# Altium PCB CONVERSOR_4_20mA.PcbDoc
Units mm, origin at the board's own origin, x right, y up, seen from the top; angles counter-clockwise.
Board outline 64.52 x 57.53 mm, 2 copper layers (Top Layer, Bottom Layer); 31 components, 21 nets, 80 pads, 9 vias.
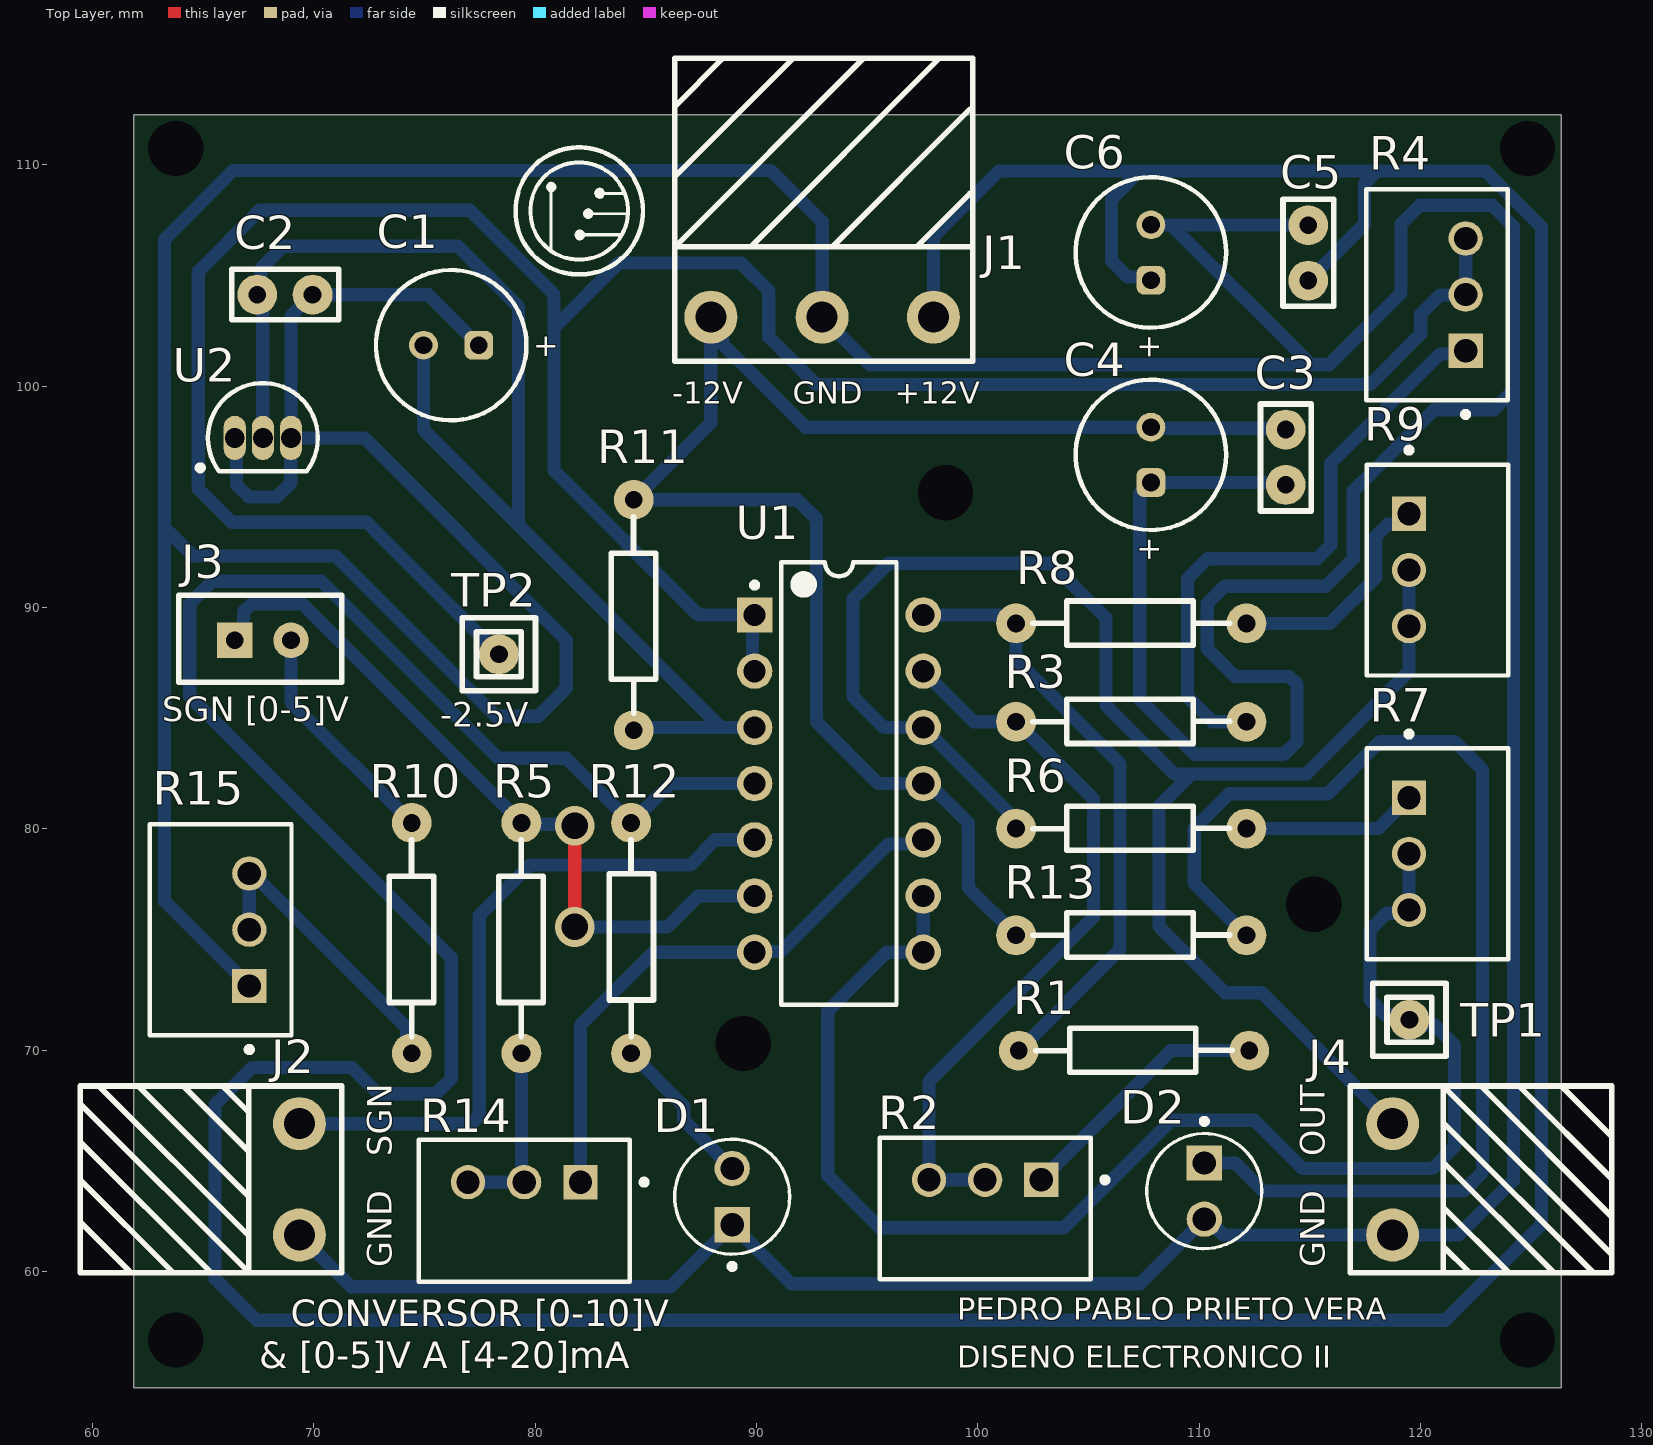
[diagram p0: Top Layer view]
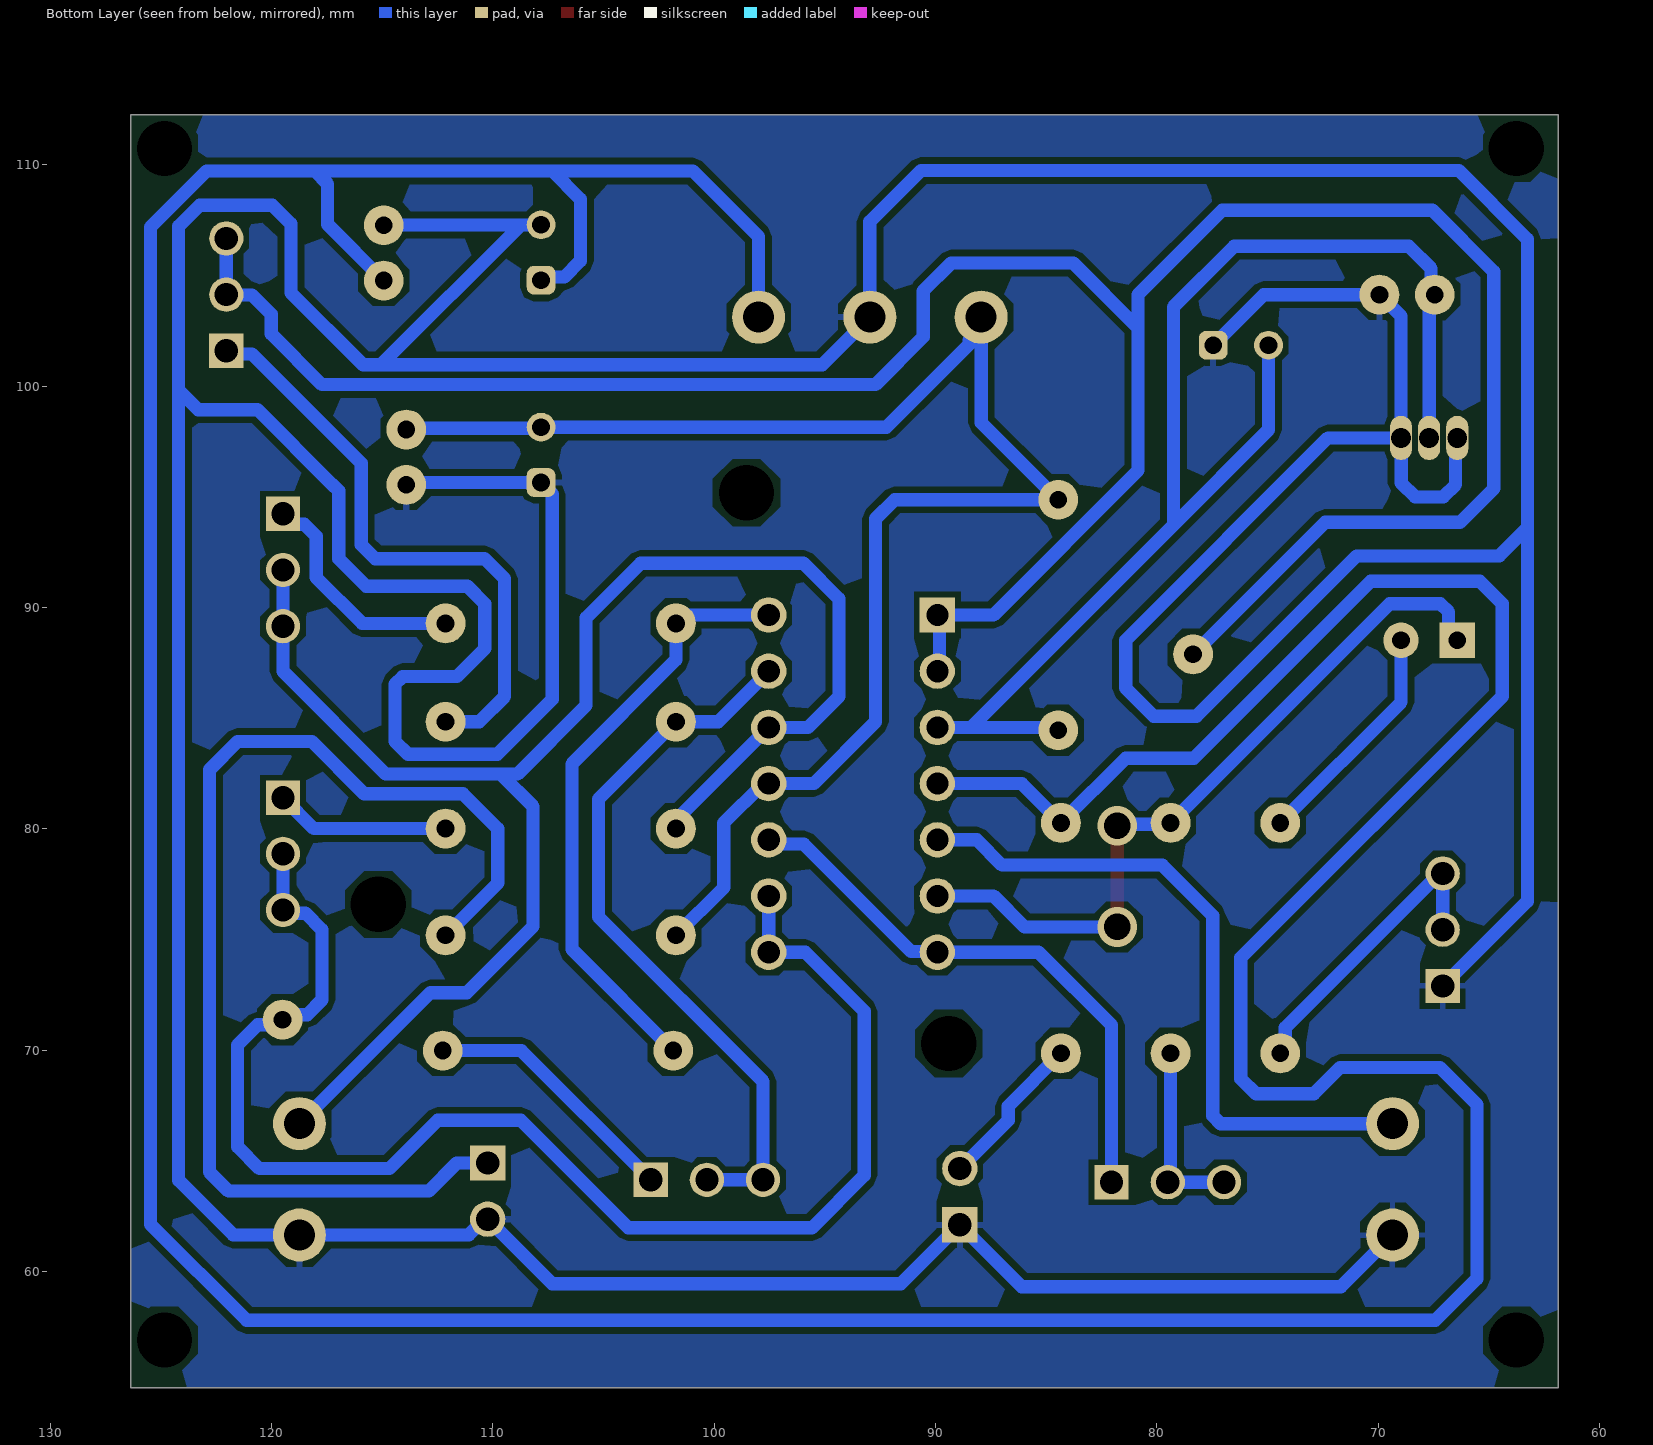
[diagram p1: Bottom Layer view, seen from below]
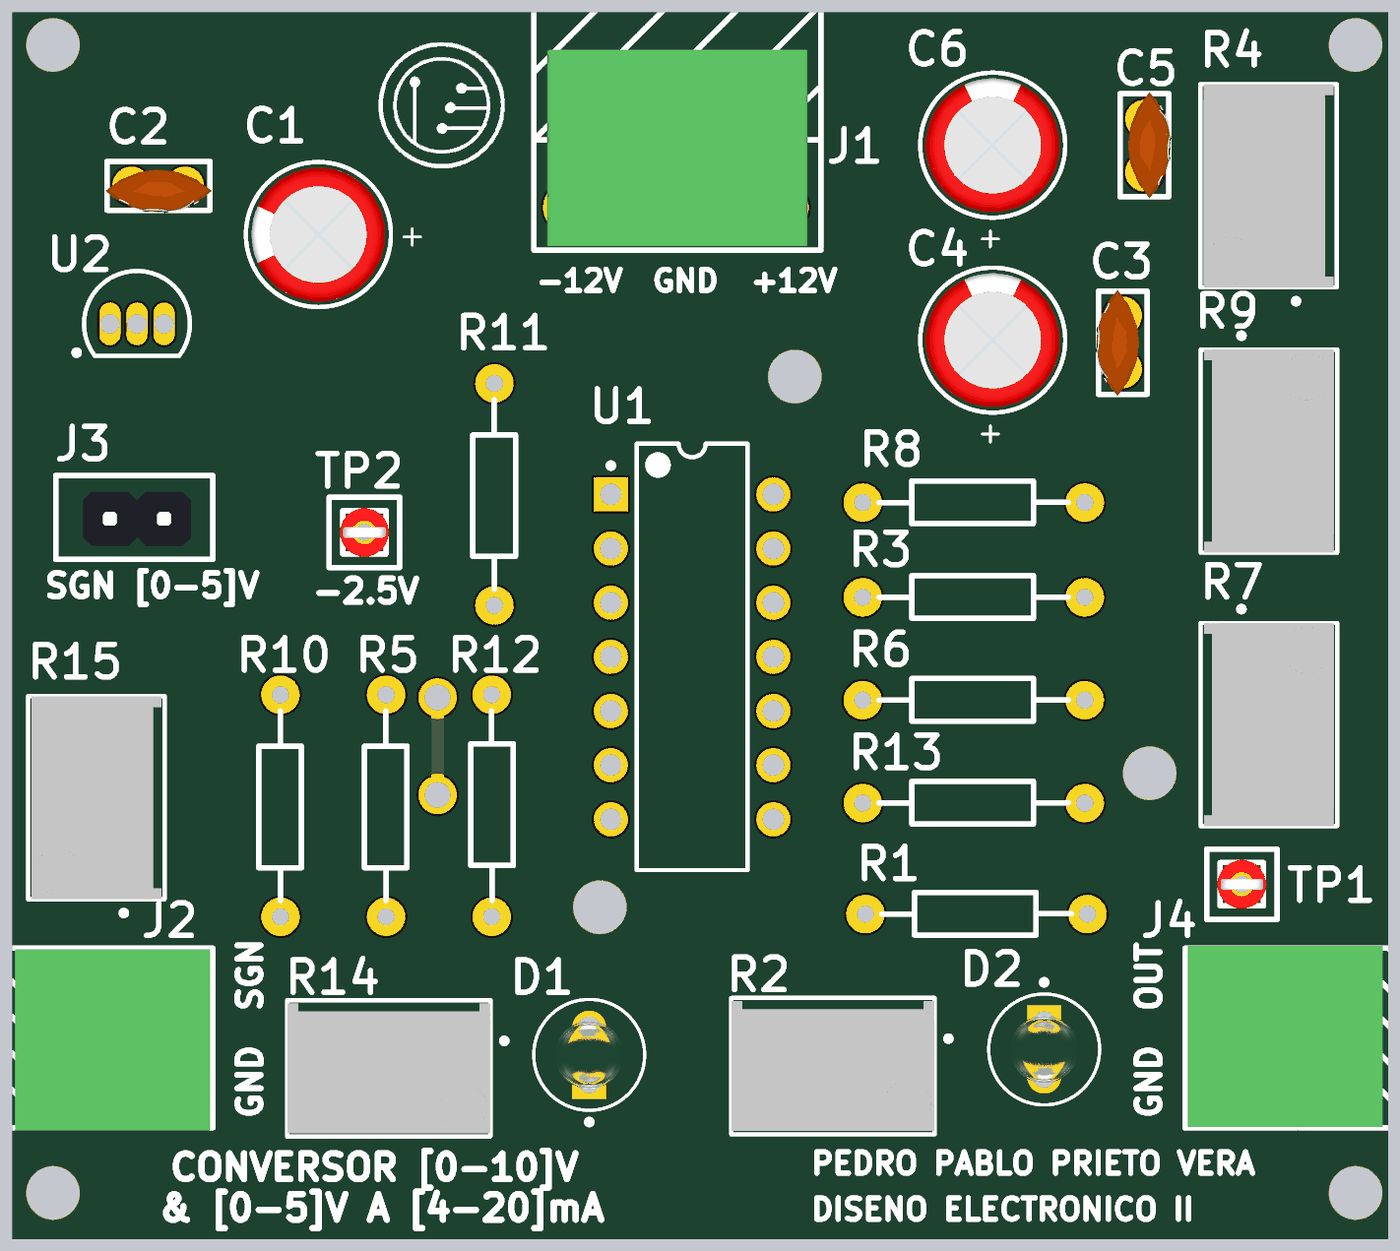
[diagram p2: 3D render of the assembled board from above, using the file's embedded part models]

## Layer stack, top to bottom
Top Solder: solder mask 0.0102, Solder Resist, Dk 3.5
Top Layer: signal copper 0.0356
Dielectric 1: dielectric 0.32, FR-4, Dk 4.8
Bottom Layer: signal copper 0.0356
Bottom Solder: solder mask 0.0102, Solder Resist, Dk 3.5

## Board outline
61.849,54.737 61.849,112.268 126.365,112.268 126.365,54.737

## Design rules (kind name [scope] priority, off if disabled: settings)
Clearance [All] p1: gap=0.27 ignorepadtopadclearanceinfootprint=FALSE
PolygonConnect [All] p1: connectstyle=Relief reliefconductorwidth=0.254 reliefentries=4 polygonreliefangle="90 Angle" airgapwidth=0.254
RoutingVias [All] p1: holewidth=0.711 width=1.27 viastyle="Through Hole" minholewidth=0.711 minwidth=1.27 maxholewidth=0.711 maxwidth=1.27
SolderMaskExpansion [All] p1: expansion=0.102 istentingtop=FALSE
Width [All] p1: maxlimit=0.9 minlimit=0.59 preferedwidth=0.6
30 further rules are at their usual default settings.

## Components (designator, comment, footprint, x,y, rotation, side; value= is the part's Value field where it differs from the comment)
C1 "1uF" WCAP-ATG8_D6.3H11 76.2,101.854 r0 top
C2 "100nF" CAP_CER_2.5mm 67.437,104.14 r0 top
C3 "100nF" CAP_CER_2.5mm 113.919,98.044 r270 top
C4 "1uF" WCAP-ATG8_D6.3H11 107.823,96.901 r270 top
C5 "100nF" CAP_CER_2.5mm 114.935,104.775 r90 top
C6 "1uF" WCAP-ATG8_D6.3H11 107.823,106.045 r270 top
D1 "TLLG4400-AS12" FP-6_544-5255_01-4-MFG 88.9,63.373 r90 top
D2 "TLLG4400-AS12" FP-6_544-5255_01-4-MFG 110.236,63.627 r270 top
J1 "BORNERA_3P" BORNERA_3P 97.994,103.124 r180 top
J2 "BORNERA-2P" BORNERA_2P 69.342,66.675 r270 top
J3 "TSW-2P" TSW-2P 66.421,88.519 r0 top
J4 "BORNERA_2P_NT" BORNERA_2P_NT 123.825,64.057 r90 top
R1 "200" RES_10K_1/4W 102.997,69.977 r0 top
R2 "500 Ohms" BOUR-3299W-3_V 100.33,62.845 r180 top
R3 "560" RES_10K_1/4W 102.87,84.836 r0 top
R4 "200 Ohms" BOUR-3299W-3_V 120.757,104.14 r90 top
R5 "1K" RES_10K_1/4W 79.375,70.993 r90 top
R6 "560" RES_10K_1/4W 102.87,80.01 r0 top
R7 "200 Ohms" BOUR-3299W-3_V 120.777,78.867 r270 top
R8 "200" RES_10K_1/4W 102.87,89.281 r0 top
R9 "500 Ohms" BOUR-3299W-3_V 120.777,91.694 r270 top
R10 "1K" RES_10K_1/4W 74.422,70.993 r90 top
R11 "1K" RES_10K_1/4W 84.455,85.598 r90 top
R12 "1k" RES_10K_1/4W 84.328,79.121 r270 top
R13 "1k" RES_10K_1/4W 102.87,75.184 r0 top
R14 "200 Ohms" BOUR-3299W-3_V 79.502,62.738 r180 top
R15 "200 Ohms" BOUR-3299W-3_V 65.786,75.438 r90 top
TP1 "Test" TEST_POINT 119.507,71.374 r0 top
TP2 "Test" TEST_POINT 78.359,87.884 r0 top
U1 "TL084MJ" J0014A 93.726,82.042 r0 top
U2 "TL431CZ" TO-92 67.691,97.663 r270 top

## Footprints (in the part's own frame and the unit in brackets; to place one, negate y for a bottom-side part, rotate by r counter-clockwise, add the part's x,y. Pads: shape width x height; smd on the part's side, far side on the other; paste and mask are expansions set on the pad)
BORNERA_2P [mm] "Bornera de 2 pines 5.03mm"
  round 2.4 hole 1.4: 1(0,0) 2(5.03,0)
  silkscreen extent -1.7,-9.91 6.73,1.91, body extent -1.65,-7.37 6.85,1.78, height 7.1
BORNERA_2P_NT [mm]
  round 2.4 hole 1.4: 1(-2.413,5.08) 2(2.617,5.08)
  silkscreen extent -4.11,-4.83 4.32,6.98, body extent -4.06,-2.29 4.44,6.86, height 7.1
BORNERA_3P [mm] "Bornera 3 pines 5.03mm"
  round 2.4 hole 1.4: 1(0,0) 2(5.03,0) 3(10.06,0)
  silkscreen extent -1.78,-11.7 11.68,2, body extent -1.16,-7.39 11.07,1.81, height 7
BOUR-3299W-3_V [mm] "TH, 3-Leads, Body 9.53x6.4mm, Pitch 2.54mm"
  rect 1.55x1.55 hole 1.05: 1(-2.54,-1.29)
  round 1.55 hole 1.05: 2(0,-1.29) 3(2.54,-1.29)
  silkscreen extent -5.54,-3.2 4.76,3.2, body extent -4.76,-3.05 4.76,3.05, height 11.55
CAP_CER_2.5mm [mm] "Capacitor ceramico 2.5mm"
  round 1.8 hole 0.8: 1(0,0) 2(2.5,0)
  silkscreen extent -1.15,-1.14 3.68,1.14, body extent -1.23,-1.27 3.77,0.76, height 5.5
FP-6_544-5255_01-4-MFG [mm]
  rect 1.6x1.6 hole 1.05 paste-1000 mask+0: 1(-1.27,0)
  round 1.6 hole 1.05 paste-1000 mask+0: 2(1.27,0)
  silkscreen extent -3.27,-2.6 2.6,2.6, body extent -2.32,-2.32 2.32,2.32, height 0.25
J0014A [mm] "DIP, 14-Leads, Body 19.95x7.2mm, Pitch 2.54mm"
  rect 1.6x1.6 hole 1: 1(-3.81,7.62)
  round 1.6 hole 1: 2(-3.81,5.08) 3(-3.81,2.54) 4(-3.81,0) 5(-3.81,-2.54) 6(-3.81,-5.08) 7(-3.81,-7.62) 8(3.81,-7.62) 9(3.81,-5.08) 10(3.81,-2.54) 11(3.81,0) 12(3.81,2.54) 13(3.81,5.08) 14(3.81,7.62)
  silkscreen extent -3.93,-10 2.6,10, body extent -3.96,-9.97 3.96,9.97, height 5.08
RES_10K_1/4W [mm] "Resistencia de 10Kohms de 1/4 de vatio"
  round 1.8 hole 0.8: 1(-1.143,0) 2(9.271,0)
  silkscreen extent -0.38,-0.98 8.51,1.02, body extent -1.45,-1.14 9.32,1.17, height 2.93
TEST_POINT [mm] "Test Point"
  round 1.8 hole 0.8: 1(0,0)
  silkscreen extent -1.65,-1.65 1.65,1.65, body extent -1.15,-1.15 1.15,1.15, height 5
TO-92 [mm] "TO, Flat Index; 3 In-Line, Axial Leads; Body Dia. 4.7mm; Lead Dia. 0.56 mm (max)"
  oval 2x1 hole 0.9: 1(0,-1.27) 2(0,0) 3(0,1.27)
  silkscreen extent -2.48,-2.95 1.5,2.48, body extent -2.48,-2.5 1.5,2.5, height 4.95
TSW-2P [mm] "TSW PIN HEADER MALE 2P"
  rect 1.6x1.6 hole 0.8: 01(0,0)
  round 1.6 hole 0.8: 02(2.54,0)
  silkscreen extent -2.54,-1.91 4.83,2.03, body extent -1.27,-1.27 3.81,1.27, height 8.34
WCAP-ATG8_D6.3H11 [mm] "Aluminum Electrolytic Capacitors, 6.3x11mm"
  rrect50% 1.3x1.3 hole 0.8: 1(1.25,0)
  round 1.3 hole 0.8: 2(-1.25,0)
  silkscreen extent -3.4,-3.4 3.4,3.4, body extent -3.14,-3.15 3.15,3.15, height 11.31

## Part data
C1 C4 C6: library part CMP-207834-000007-2, "CAP 220 UF 20% 25 V", Capacitance=220µF, Case/Package=Radial, Leakage Current=55µA, Max Operating Temperature=85°C, Min Operating Temperature=-40°C, Ripple Current=310mA, Tolerance=20%, Voltage Rating=25V, Diameter=6.3mm, Dissipation Factor=14%, Height=11mm, Height - Seated (Max)=12.4968mm, Lead Pitch=2.4892mm, Length=11mm, Life (Hours)=2000hours, Material=Aluminium, Mount="Through Hole", NexarPartId=54007213, Packaging="Tape & Box (TB)", Pitch=2.5mm, Polarity=Polar, REACH SVHC=Unknown, RoHS=Compliant, Voltage Rating (DC)=25V
C2 C3 C5: library part CER_104, "Capactior ceramico 2.5mm"
D1 D2: library part CMP-02520-000017-1, "LED GREEN DIFFUSED T-1 T/H", Case/Package=T, Color=Green, Forward Current=7mA, Forward Voltage=2.4V, Max Operating Temperature=100°C, Min Operating Temperature=-40°C, Power Dissipation=20mW, Reverse Voltage=20V, Test Current=2mA, Depth=3.2mm, Dominant Wavelength=575nm, Length=3.2mm, Lens Style=Diffused, Luminous Intensity=2mcd, Mount="Through Hole", Number of Elements=1, Number of LEDs=1, Number of Pins=2, Packaging="Tape and Reel", Radiation Hardening=No, RoHS Compliant=No, Viewing Angle=50°
J1: "Conector 3 pines"
J2: "Connector 2 pines"
R1 R3 R5 R6 R8 R10 R11 R12 R13: library part RES_10K_1/4W, "Resistencia de 100kohms de 1/4 de vatio"
R2 R4 R7 R9 R14 R15: library part CMP-2000-05584-1, "Square Trimpot(R) Trimming Potentiometer, 10 KOhm, +/- 10%, 500 mW, -55 to 125 degC, 3-Pin THD, RoHS, Tube", Manufacturer=Bourns, Operating Temperature Range=-55Cto+125C, Package Description="3-Pin Surface Mount Device, Body 9.53 x 6.1 mm, Pitch 2.54 mm", Package Reference=3299W, Power Rating=500mW(1/2W), Resistance=10kOhms, Tolerance=10%, Adjustment=TopCrossed, Brand=Bourns, Datasheet URL=http://www.bourns.com/docs/Product-Datasheets/3299.pdf, Datasheet Version=04/2014, Element Type=Cermet, Length=10.03mm, Manufacturer URL=http://www.bourns.com/, Mounting=PanelMount, Mounting Technology=ThroughHole, Packaging=Tube, Product=Multiturn, Product Category=TrimmerResistors-ThroughHole, Product Type=SquareTrimmingPotentiometer, Qualification=Commercial, RoHS="No /  / RoHSVersionAvailable", Series=3299, Taper=Linear, Termination Style=Pin, Tradename=Trimpot, Type=Trimmers, Unit Weight=0.035000oz, Width=9.53mm
TP1 TP2: library part TEST_POINT, "Test Point"
U1: library part CMP-0017-00779-2, "High Speed JFET-Input Quad Operational Amplifier, -55 to 125 degC, 14-pin DIP (J14)", Manufacturer="Texas Instruments", Rating=Military, CMRR(Min)(dB)=80, ComponentLink1Description="Manufacturer URL", ComponentLink1URL=http://www.ti.com/, ComponentLink2Description=Datasheet, ComponentLink2URL=http://www.ti.com/lit/ds/symlink/tl084m.pdf, ComponentLink3Description="Package Specification", ComponentLink3URL=http://www.ti.com/litv/pdf/mcer002d, DatasheetVersion=SLOS081G, IIB(Max)(pA)=200, Mounting Technology="Through Hole", Offset Drift(Typ)(uV/C)=18, PackageDescription="14-Pin Ceramic, Glass In-Line, Row Spacing 7.62 mm, Pitch 2.54 mm", PackageReference=J0014A, PackageVersion="4040083/F, 03/2003", PartNumber=TL084MJ, Slew Rate(Typ)(V/us)=13, Sub Family="General Purpose Amplifier", Vio (25C)(Max)(mV)=9, Vn at 1kHz(Typ)(nV/rtHz)=18
U2: library part CMP-0242-00004-1, "Programmable Voltage Reference, 2.5 to 36V, 3-Pin TO-92", ComponentLink1Description="Manufacturer URL", ComponentLink1URL=http://www.st.com, ComponentLink2Description=Datasheet, ComponentLink2URL=http://www.st.com/internet/com/TECHNICAL_RESOURCES/TECHNICAL_LITERATURE/DATASHEET/CD00000986.pdf, DatasheetVersion=Oct-2011, PackageDescription="TO, Flat Index; 3 In-Line, Axial Leads; Body Dia. 4.7mm; Lead Dia. 0.56 mm (max)", PackageReference=TO-92, PackageVersion=2011

## Via types
v1: diameter 1/1 (per signal layer), hole 2.5, Top Layer to Bottom Layer, 7 vias
v2: diameter 1.8/1.8 (per signal layer), hole 1.2, Top Layer to Bottom Layer, 2 vias

## Nets (pads, with @x,y where several pads share a name; then routed paths per layer and width w, separated by ;. In a path a pad name is that pad's centre, name@x,y a point inside that pad or via, vN(x,y) a via of type N, cw(c..) or ccw(c..) an arc to the next point about the centre after c; other vN are vias at no path point)
+12V: C5.1 C6.1 J1.1 R12.1 U1.4 | length 231.5
  Bottom Layer w0.6: U1.4 86.106,82.042 R12.1 81.407,83.185 78.334,83.185 70.333,91.186 65.405,91.186 64.389,90.17 64.389,85.979 76.2,74.168 76.2,68.707 75.514,68.021 72.898,68.021 71.704,69.215 67.204,69.215 65.532,67.543 65.532,59.669 67.416,57.785 121.133,57.785 125.476,62.128 125.476,107.188 122.936,109.728 118.059,109.728 ; J1.1 97.994,106.757 100.965,109.728 107.315,109.728 ; C6.1 107.686,104.932 106.777,104.932 106.045,105.664 106.045,108.458 107.315,109.728 ; C5.1 117.475,107.315 117.475,109.144 118.059,109.728 ; 107.315,109.728 118.059,109.728
-12V: C3.1 C4.2 J1.3 R11.2 R13.1 U1.11 | length 70.1
  Bottom Layer w0.6: J1.3 J1.3@87.934,102.439 ; R13.1 99.568,77.343 99.568,80.264 97.79,82.042 U1.11 95.504,82.042 92.71,84.836 92.71,94.005 91.846,94.869 R11.2 87.934,98.348 J1.3@87.934,102.439 ; C3.1 113.866,98.098 107.876,98.098 C4.2 92.222,98.151 88.476,101.897 88.476,102.094 88.132,102.439 J1.3@87.934,102.439
GND: C1.1 C2.2 C3.2 C4.1 C5.2 C6.2 D1.1 D2.2 J1.2 J2.2 J4.1 R15.1 U2.1 U2.3 | length 345.2
  Bottom Layer w0.6: U2.1 66.498,97.586 66.498,95.554 67.056,94.996 68.326,94.996 68.956,95.626 68.956,97.658 U2.3 ; R15.1 63.246,76.728 63.246,93.599 ; J2.2 71.678,59.309 86.106,59.309 D1.1 91.567,59.436 107.315,59.436 D2.2 110.374,62.357 111.087,61.644 J4.1 121.742,61.644 124.206,64.108 124.206,99.822 ; C1.1 75.164,104.14 C2.2 68.961,103.164 U2.3 ; C6.2 107.833,107.285 108.742,107.285 ; C3.2 113.812,95.651 C4.1 107.823,95.637 107.315,95.129 107.315,85.852 109.804,83.363 113.838,83.363 114.427,83.952 114.427,86.527 114.076,86.878 111.629,86.878 110.363,88.144 110.363,90.174 111.148,90.959 115.724,90.959 116.967,92.202 116.967,95.274 117.272,95.579 ; C5.2 114.925,107.285 108.742,107.285 ; 115.002,100.965 95.123,100.965 J1.2 92.964,107.442 90.653,109.753 66.349,109.753 63.246,106.651 63.246,93.599 ; 115.875,100.965 115.062,100.965 108.742,107.285 ; 115.917,101.007 119.126,104.216 119.126,107.345 119.966,108.185 123.249,108.185 124.206,107.228 124.206,99.822 ; 117.283,95.579 120.637,98.933 123.317,98.933 124.206,99.822 ; 63.246,93.599 64.516,92.329 70.968,92.329 78.207,85.09 80.137,85.09 81.407,86.36 81.407,88.519 72.263,97.663 U2.3
NetC1_2: C1.2 C2.1 R11.1 U1.3 U2.2 | length 59.2
  Bottom Layer w0.6: U2.2 67.691,103.886 C2.1 67.602,104.305 67.602,105.321 68.605,106.324 76.505,106.324 79.248,103.581 79.248,93.726 ; C1.2 74.95,98.024 79.248,93.726 ; R11.1 84.582,84.582 88.392,84.582 ; U1.3 88.392,84.582 ; 79.248,93.726 88.392,84.582
NetD1_2: D1.2 R12.2 | length 7.1
  Bottom Layer w0.6: R12.2 86.714,67.464 86.714,66.829 D1.2
NetD2_1: D2.1 R13.2 | length 52.6
  Bottom Layer w0.6: D2.1 111.633,64.897 112.903,63.627 121.95,63.627 122.809,64.486 122.809,82.677 121.539,83.947 118.188,83.947 115.826,81.585 111.354,81.585 109.779,80.01 109.779,77.546 R13.2
NetJ2_1: J2.1 U1.5 | length 31.2
  Bottom Layer w0.6: J2.1 77.119,66.675 77.47,67.026 77.47,76.073 79.756,78.359 86.995,78.359 88.138,79.502 U1.5
NetJ3_01: J3.01 R5.2 U1.6 | length 34
  Top Layer w0.6: v2(81.788,75.565) v2(81.788,80.137)
  Bottom Layer w0.6: J3.01 66.813,88.911 66.813,89.8 67.183,90.17 69.469,90.17 R5.2 79.438,80.2 81.724,80.2 v2(81.788,80.137) ; v2(81.788,75.565) 85.979,75.565 87.376,76.962 U1.6
NetJ3_02: J3.02 R10.2 | length 10.5
  Bottom Layer w0.6: J3.02 68.961,85.725 R10.2
NetJ4_2: J4.2 R6.1 R9.2 R9.3 U1.12 | length 74.8
  Bottom Layer w0.6: R6.1 101.727,80.391 U1.12 95.756,84.582 94.361,85.977 94.361,90.396 95.963,91.999 103.327,91.999 105.791,89.535 105.791,85.573 108.89,82.474 109.652,82.474 ; J4.2 112.826,72.593 111.189,72.593 108.185,75.597 108.185,81.007 109.652,82.474 ; R9.2 R9.3 119.487,87.122 114.839,82.474 109.652,82.474
NetR1_1: R1.1 R8.1 U1.14 | length 27.5
  Bottom Layer w0.6: U1.14 101.346,89.662 R8.1 101.727,87.63 106.426,82.931 106.426,74.549 R1.1
NetR1_2: R1.2 R2.1 | length 11.8
  Bottom Layer w0.6: R2.1 108.712,69.977 R1.2
NetR2_2: R2.2 R2.3 R3.1 U1.13 | length 32.9
  Bottom Layer w0.6: U1.13 99.822,84.836 R3.1 105.23,81.333 105.23,76.02 97.79,68.58 R2.3 R2.2
NetR3_2: R3.2 R4.1 | length 27.5
  Bottom Layer w0.6: R3.2 110.617,84.836 109.474,85.979 109.474,91.294 110.379,92.199 115.313,92.199 115.951,92.837 115.951,96.52 120.886,101.455 121.902,101.455 R4.1
NetR4_2: R4.2 R4.3 TP2.1 U1.1 U1.2 | length 118.3
  Bottom Layer w0.6: TP2.1 72.39,93.853 66.294,93.853 64.77,95.377 64.77,105.181 67.539,107.95 77.038,107.95 80.848,104.14 80.848,102.641 ; U1.2 89.814,87.224 89.814,89.56 U1.1 87.376,89.662 80.848,96.19 80.848,102.641 ; R4.3 122.047,104.394 R4.2 122.034,104.127 120.891,104.127 120.015,103.251 120.015,102.362 117.729,100.076 92.71,100.076 90.551,102.235 90.551,104.307 89.289,105.569 83.775,105.569 80.848,102.641
NetR5_1: R5.1 R14.2 R14.3 | length 8.4
  Bottom Layer w0.6: R14.3 R14.2 79.375,64.155 R5.1
NetR6_2: R6.2 R7.1 | length 7.9
  Bottom Layer w0.6: R6.2 118.09,80.01 R7.1
NetR7_2: R7.2 R7.3 TP1.1 U1.8 U1.9 | length 64.8
  Bottom Layer w0.6: U1.9 U1.8 95.885,74.422 93.218,71.755 93.218,64.336 95.578,61.976 103.886,61.976 108.737,66.827 112.497,66.827 114.681,64.643 120.553,64.643 121.539,65.629 121.539,70.231 120.624,71.146 TP1.1@119.735,71.146 ; R7.2 R7.3 119.337,76.177 118.468,76.177 117.729,75.438 117.729,72.263 118.39,71.602 119.279,71.602 TP1.1
NetR8_2: R8.2 R9.1 | length 10.5
  Bottom Layer w0.6: R8.2 115.911,89.281 117.983,91.353 117.983,93.218 118.524,93.759 119.012,93.759 R9.1
NetR10_1: R10.1 R15.2 R15.3 | length 13.8
  Bottom Layer w0.6: R15.2 R15.3 67.231,77.978 74.192,71.017 74.192,70.08 R10.1
NetR14_1: R14.1 U1.7 U1.10 | length 26.1
  Bottom Layer w0.6: R14.1 82.042,71.12 85.344,74.422 U1.7 89.947,74.453 91.09,74.453 95.948,79.311 97.345,79.311 U1.10
copper on no net:
  other v1: 63.754,56.896 124.841,56.896 89.398,70.297 115.184,76.584 98.542,95.189 63.754,110.744 124.841,110.744

## Polygon pours and split planes (outlines as drawn)
GND on Bottom Layer "NONET_L-01_P-001" (solid, pour order 0): 61.849,54.737 126.365,54.737 126.365,112.268 61.849,112.268

## Silkscreen, mask and mechanical layers (free items; w line width, h text height)
Top Overlay:
  drawing of 2 lines, arcs and shapes, not listed
  text "-12V" at 86.185,99.206 h1
  text "GND" at 91.631,99.206 h1
  text "+12V" at 96.245,99.206 h1
  text "SGN [0-5]V" at 63.138,84.855 h1.1
  text "-2.5V" at 75.711,84.601 h1.1
  text "SGN" at 73.514,65.209 h1.1 r90
  text "OUT" at 115.678,65.208 h1.1 r90
  text "GND" at 73.514,60.179 h1.1 r90
  text "GND" at 115.678,60.178 h1.1 r90
  text "PEDRO PABLO PRIETO VERA" at 99.079,57.804 h1
  text "CONVERSOR [0-10]V" at 68.953,57.523 h1.2
  text "DISENO ELECTRONICO II" at 99.079,55.645 h1
  text "& [0-5]V A [4-20]mA" at 67.537,55.618 h1.2

## Text inside footprints (layer, text, board x,y; h text height)
C1: Top Overlay "+" at 79.9,101.354 h1
C4: Top Overlay "+" at 107.323,93.201 h1 r270
C6: Top Overlay "+" at 107.323,102.345 h1 r270